# EAGLE board JDM2_NoSocket_Mirrored (EAGLE 7.6.0)
JDM2 without DIL-Socket
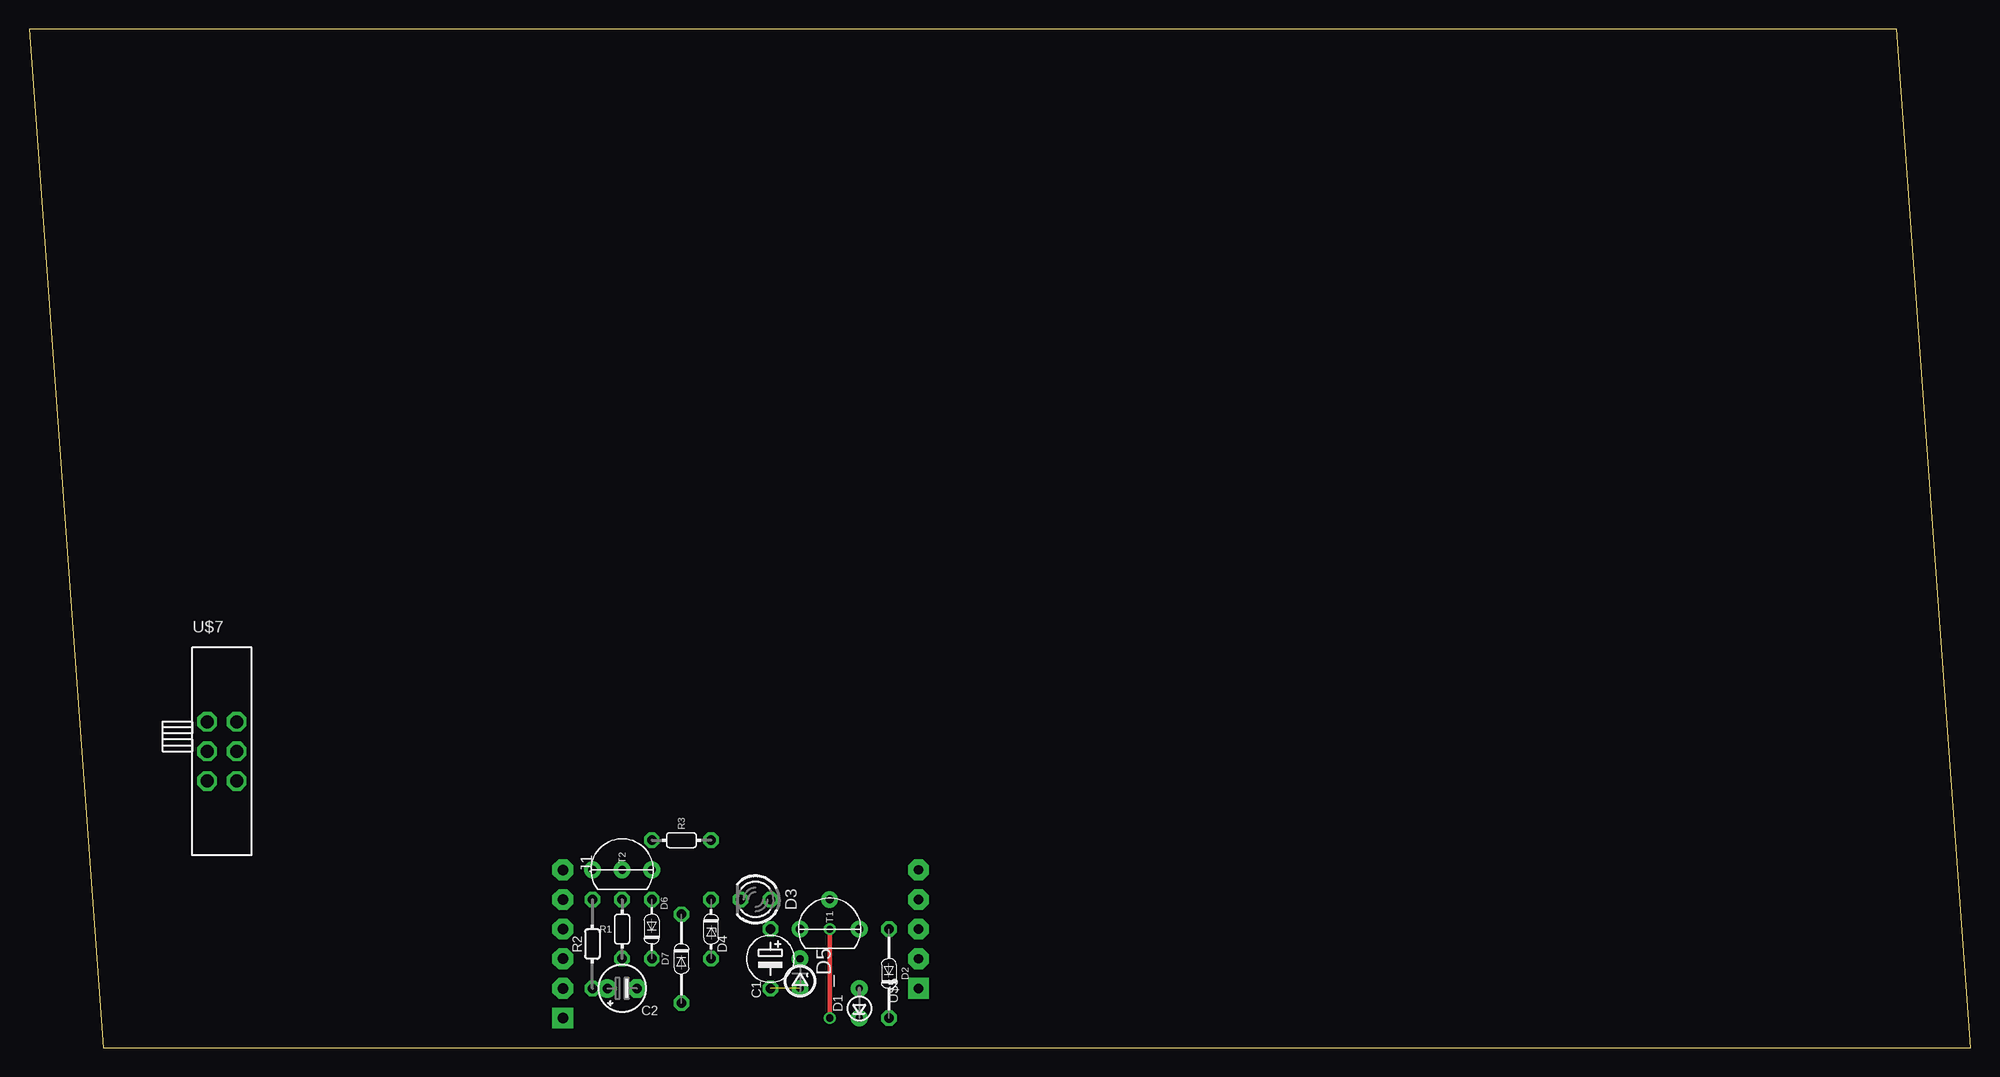
[diagram p0: board, top side]
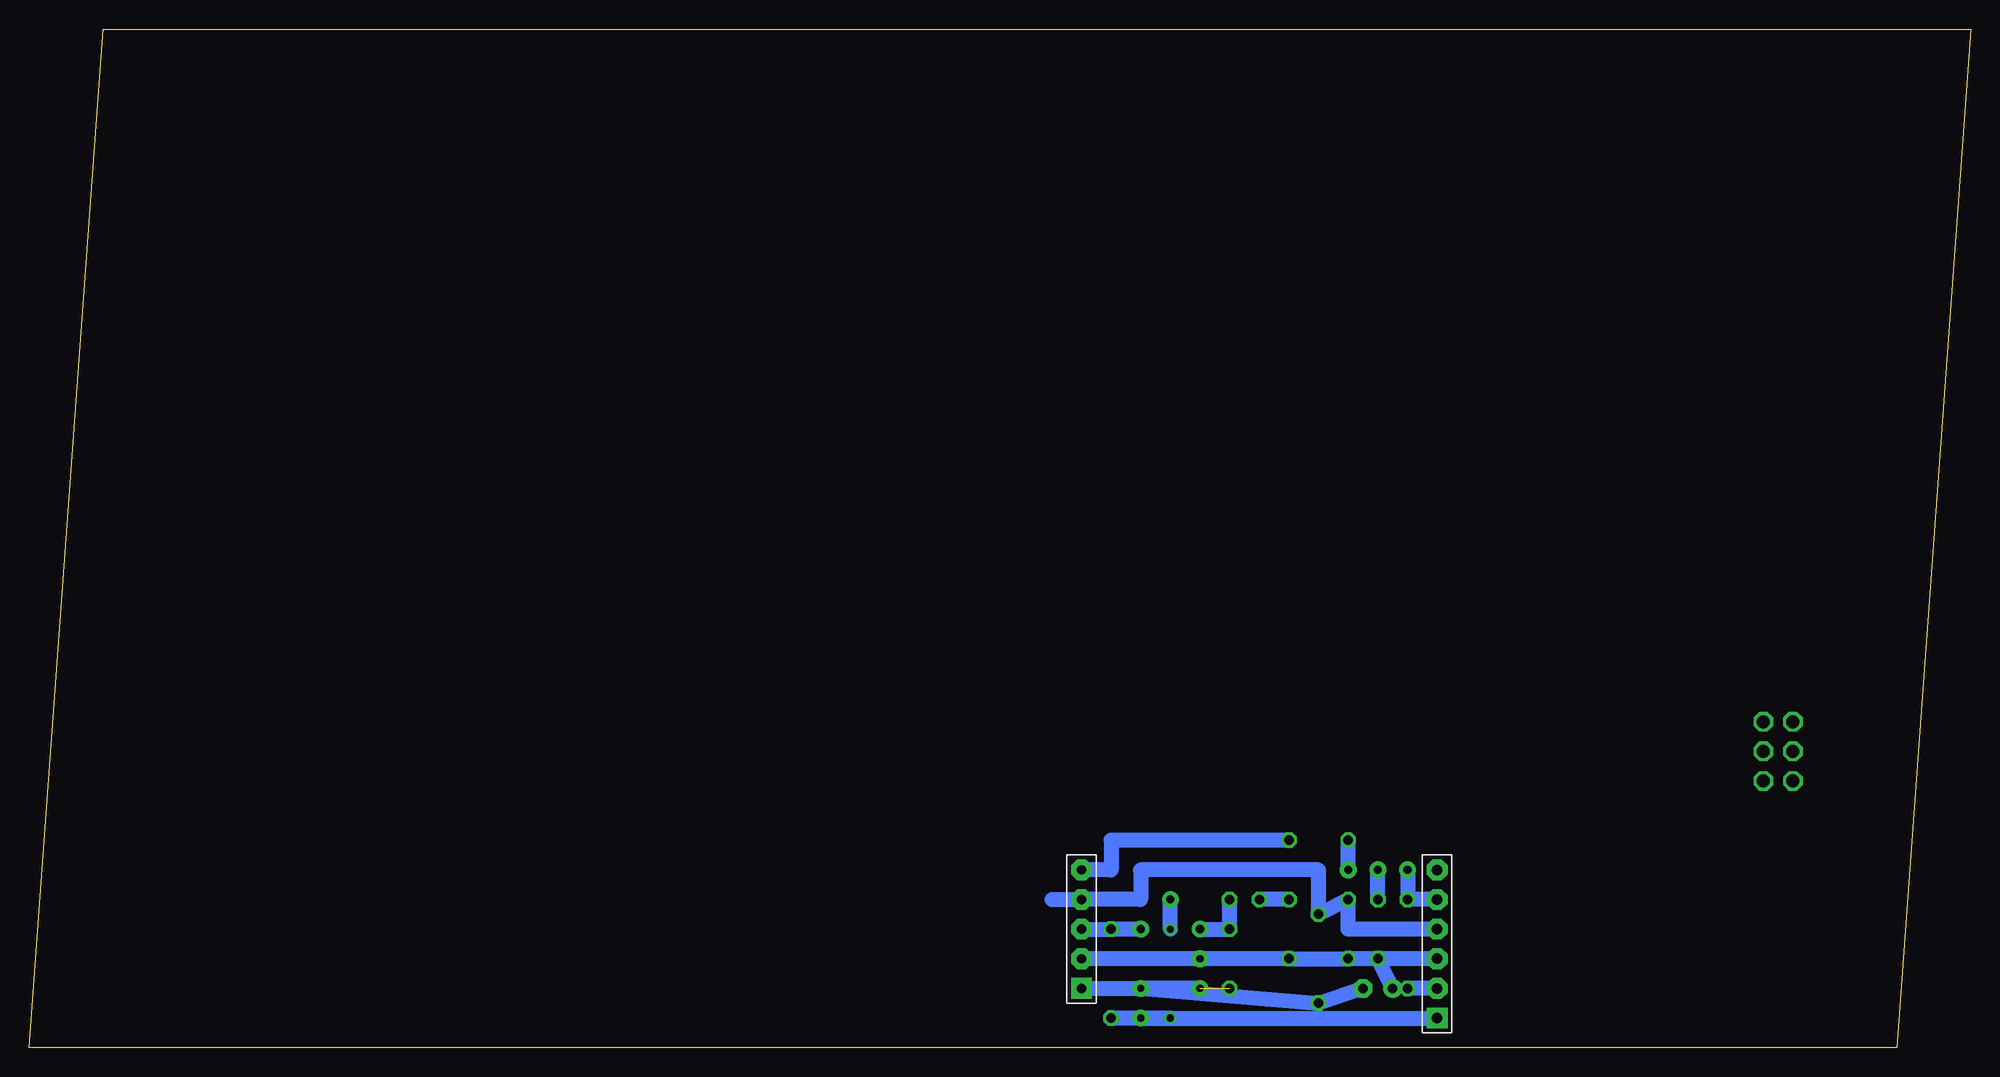
[diagram p1: board, bottom side, seen from below]

Size 166.35 x 87.3 mm. Coordinates in mm from the lower left corner, seen from the top.
Outline: 6.35,0 166.35,0 160,87.3 0,87.3 6.35,0
Copper layers (1*16): Top 0.035mm / dielectric 1.5mm / Bottom 0.035mm
Design rules "default": minimum track width 10mil, minimum drill 24mil, track to track 8mil, track to pad 8mil, pad to pad 8mil, via to via 8mil, smd to smd 8mil, copper to edge 40mil, drill to drill 8mil, minimum pad ring 10mil, minimum via ring 8mil, stop-mask expansion 4mil, vias tented up to drill 0mil, thermal gap 10mil
Net classes: 0 default: width 0.559 mm; 1 power: width 0.559 mm

## Footprints (pad centres in the part's own frame; a part is rotated, then mirrored left to right if it is on the bottom)
DO35Z2_54 = drill 0.6 pad 1.422: A 1.27,0; C -1.27,0
E5-4 = drill 0.813 octagon: + 2.54,0; - -2.54,0
E2,5-4 = drill 0.813 pad 1.6: + 2.54,0 | drill 0.813 pad 1.6 octagon: - 0,0
DO34-2,5-A = drill 0.6 pad 1.422: A 1.27,0; C -1.27,0
DO34-7 = drill 0.813 octagon: A -3.81,0; C 3.81,0
LED3MM = drill 0.813 octagon: A -1.27,0; K 1.27,0
DO34Z5 = drill 0.813 octagon: A -2.54,0; C 2.54,0
DO34-5 = drill 0.813 octagon: A 2.54,0; C -2.54,0
RS232-6PIN = drill 0.9 pad 1.778 square: 1 0,0 | drill 0.9 pad 1.778 octagon: 2 2.54,0; 3 5.08,0; 4 7.62,0; 5 10.16,0; 6 12.7,0
0202/5 = drill 0.813 octagon: 1 0,-2.54; 2 0,2.54
0202/7 = drill 0.813 octagon: 1 0,-3.81; 2 0,3.81
TO92-CBE-A = drill 0.7 pad 1.422: B 2.54,0; C 0,2.54; E 0,-2.54
TO92-CBE = drill 0.7 pad 1.422: B 0,0; C 0,2.54; E 0,-2.54
PIC-ICSP = drill 0.8 pad 1.778 square: 1 -5.08,0 | drill 0.8 pad 1.778 octagon: 2 -2.54,0; 3 0,0; 4 2.54,0; 5 5.08,0
SLSW-2P2T-H = drill 1.118 pad 1.524 octagon: 1 -1.27,2.54; 2 -1.27,0; 3 -1.27,-2.54; 4 1.27,2.54; 5 1.27,0; 6 1.27,-2.54

## Placement (x,y rotation side)
_D5  Z=5.1V  [DO35Z2_54]  66.04,6.35 270 top
C1  100μF  [E5-4]  63.5,7.62 90 top
C2  22μF  [E2,5-4]  52.07,5.08 180 top
D1  1N4148  [DO34-2,5-A]  71.12,3.81 90 top
D2  1N4148  [DO34-7]  73.66,6.35 270 top
D3  Vpp  [LED3MM]  62.23,12.7 180 top
D4  Z=8.1V  [DO34Z5]  58.42,10.16 90 top
D6  1N4148  [DO34-5]  53.34,10.16 90 top
D7  1N4148  [DO34-7]  55.88,7.62 90 top
J1  COMPORT-6PIN  [RS232-6PIN]  45.72,2.54 90 top
R1  10kΩ  [0202/5]  50.8,10.16 180 top
R2  1.5kΩ  [0202/7]  48.26,8.89 0 top
R3  100Ω  [0202/5]  55.88,17.78 90 top
T1  BC547CBE-A  [TO92-CBE-A]  68.58,10.16 90 top
T2  BC547CBE  [TO92-CBE]  50.8,15.24 90 top
U$5  PIC-ICSPICSP  [PIC-ICSP]  76.2,10.16 90 top
U$7  SL-SW-2P-2T-H  [SLSW-2P2T-H]  16.51,25.4 0 top

## Library data of the parts
_D5 D1 D2 D4 D6 D7 = d
C1 C2 = c
D3 = led
J1 U$5 = pinconn
R1-R3 = r
T1 T2 = t
U$7 = sw

## Nets
/MCLR: D2.A T1.E U$5.3
CLK: D6.A D7.C J1.4 U$5.4
CTS: J1.5 R2.2 T2.C
DATA: R3.2 T2.E
DTR: J1.2 R2.1
N$1: R1.1 T2.B
N$5: D3.K D4.C
PGD: R3.1 U$5.5
TXD: D1.C D2.C J1.1 T1.B
VDD: _D5.C C2.+ D4.A D6.C J1.3 R1.2 U$5.2
VPP: C1.+ D3.A T1.C
VSS: _D5.A C1.- C2.- D1.A D7.A U$5.1

## Tracks (layer width: path | path; a pad name or v marks a point on that pad's centre or on a via)
/MCLR
  Bottom 1.27: U$5.3 D2.A T1.E
CLK
  Bottom 1.27: J1.4 53.34,10.16 D6.A D7.C 55.88,15.24 71.12,15.24 71.12,12.7 U$5.4 78.74,12.7
CTS
  Bottom 1.27: J1.5 R2.2 T2.C
DATA  (via drill 0.6)
  Bottom 1.27: T2.E R3.2
  other vias: 53.34,15.24 53.34,15.24
DTR
  Bottom 1.27: J1.2 R2.1
N$1
  Bottom 1.27: R1.1 T2.B
N$5
  Bottom 1.27: D4.C D3.K
PGD
  Bottom 1.27: R3.1 73.66,17.78 73.66,15.24 U$5.5
TXD  (via drill 0.6)
  Top 0.406: v68.58,2.54 v68.58,10.16
  Bottom 1.27: D2.C v68.58,2.54 D1.C J1.1 | v68.58,10.16 T1.B
  other vias: 68.58,12.7
VDD
  Bottom 1.27: J1.3 R1.2 | U$5.2 _D5.C D4.A D6.C R1.2 | C2.+ R1.2
VPP
  Bottom 1.27: T1.C C1.+ D3.A
VSS  (1 unrouted)
  Bottom 1.27: U$5.1 D1.A | C2.- D7.A D1.A | _D5.A D1.A